# Altium PCB T&H Data Logger.PcbDoc
Units mm, origin at the board's own origin, x right, y up, seen from the top; angles counter-clockwise.
Board outline 79.25 x 89.7 mm, 2 copper layers (Top Layer, Bottom Layer), stack 1.569 mm thick; 39 components, 30 nets, 147 pads, 29 vias.
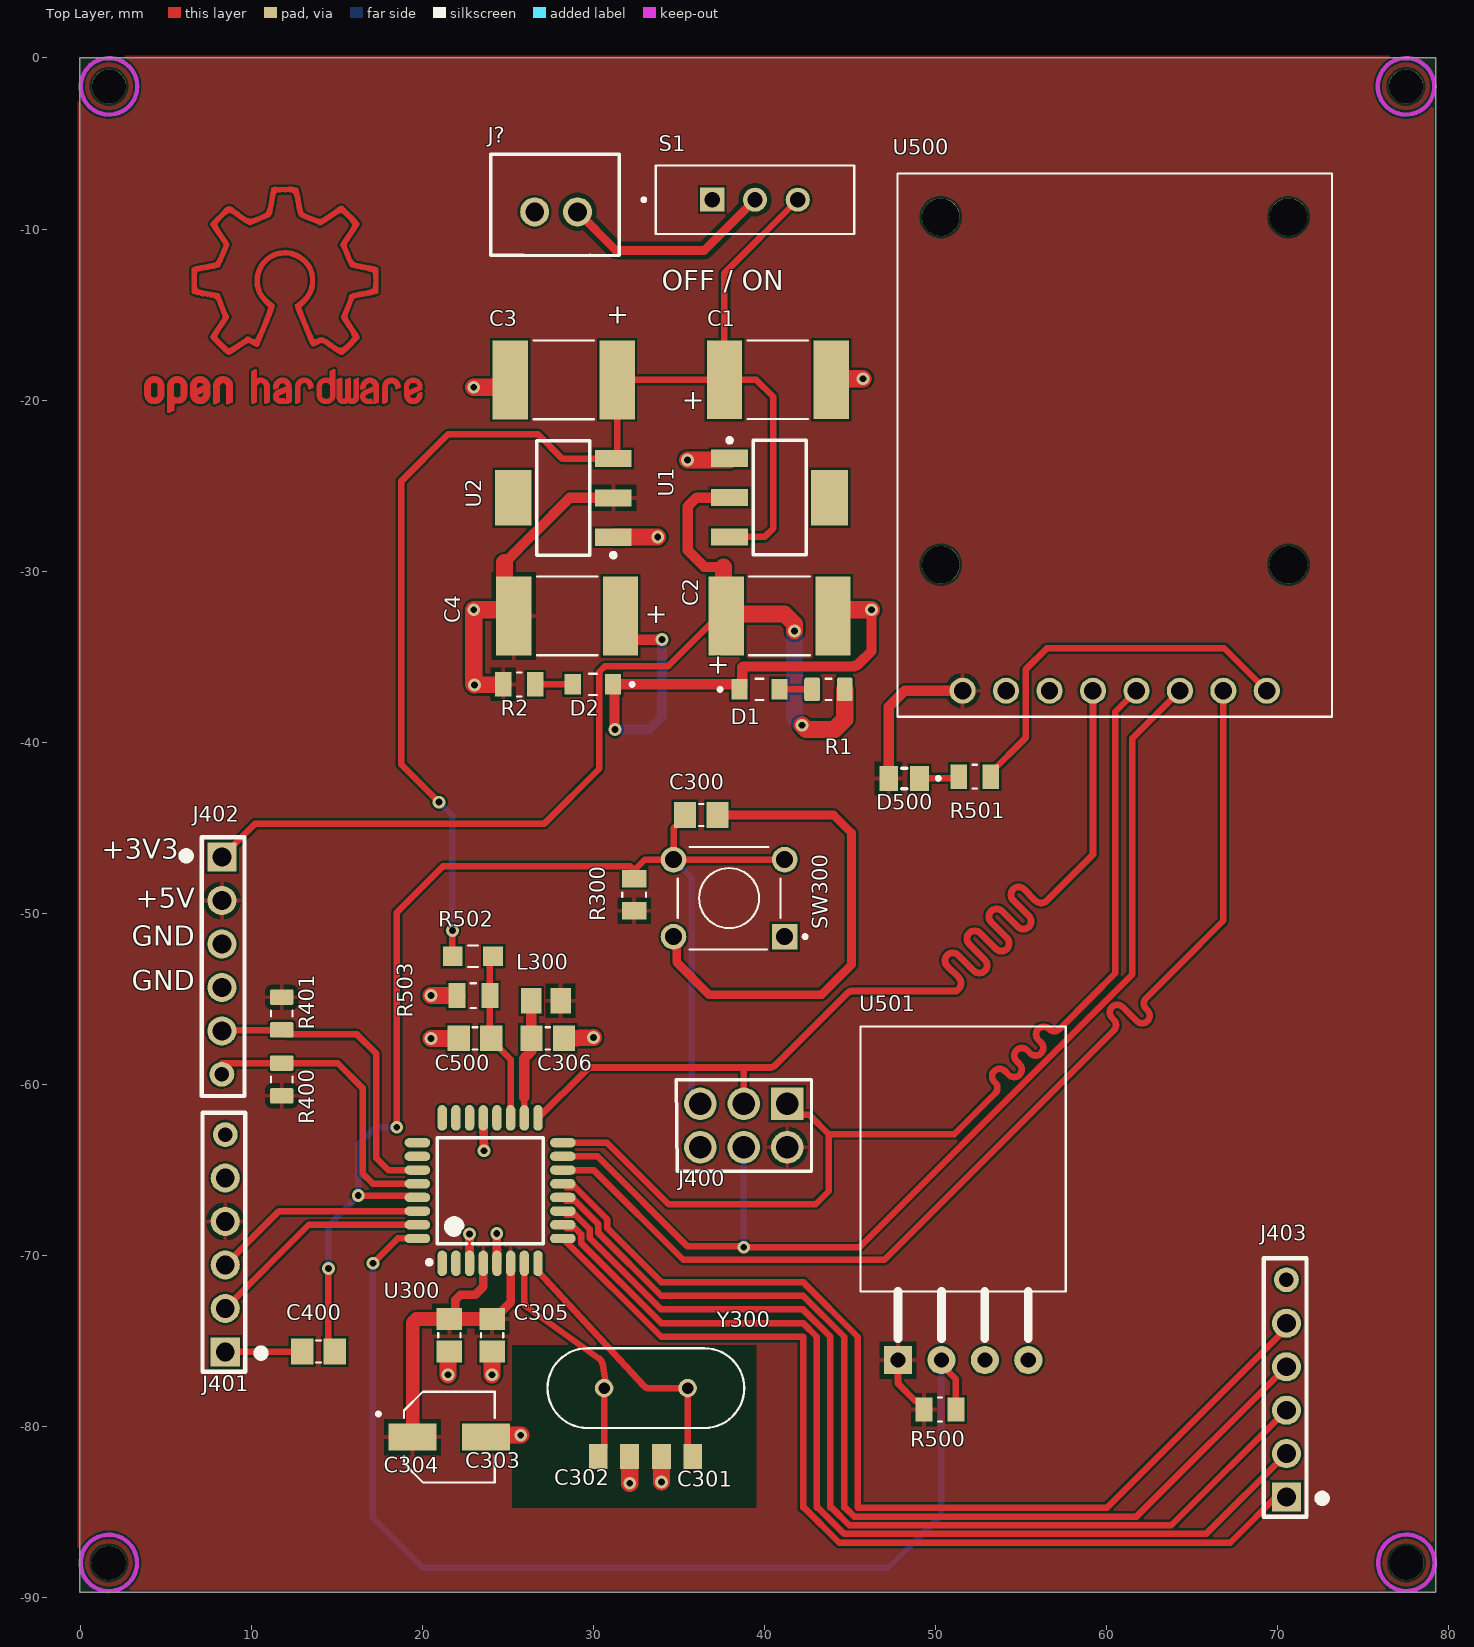
[diagram p0: Top Layer view]
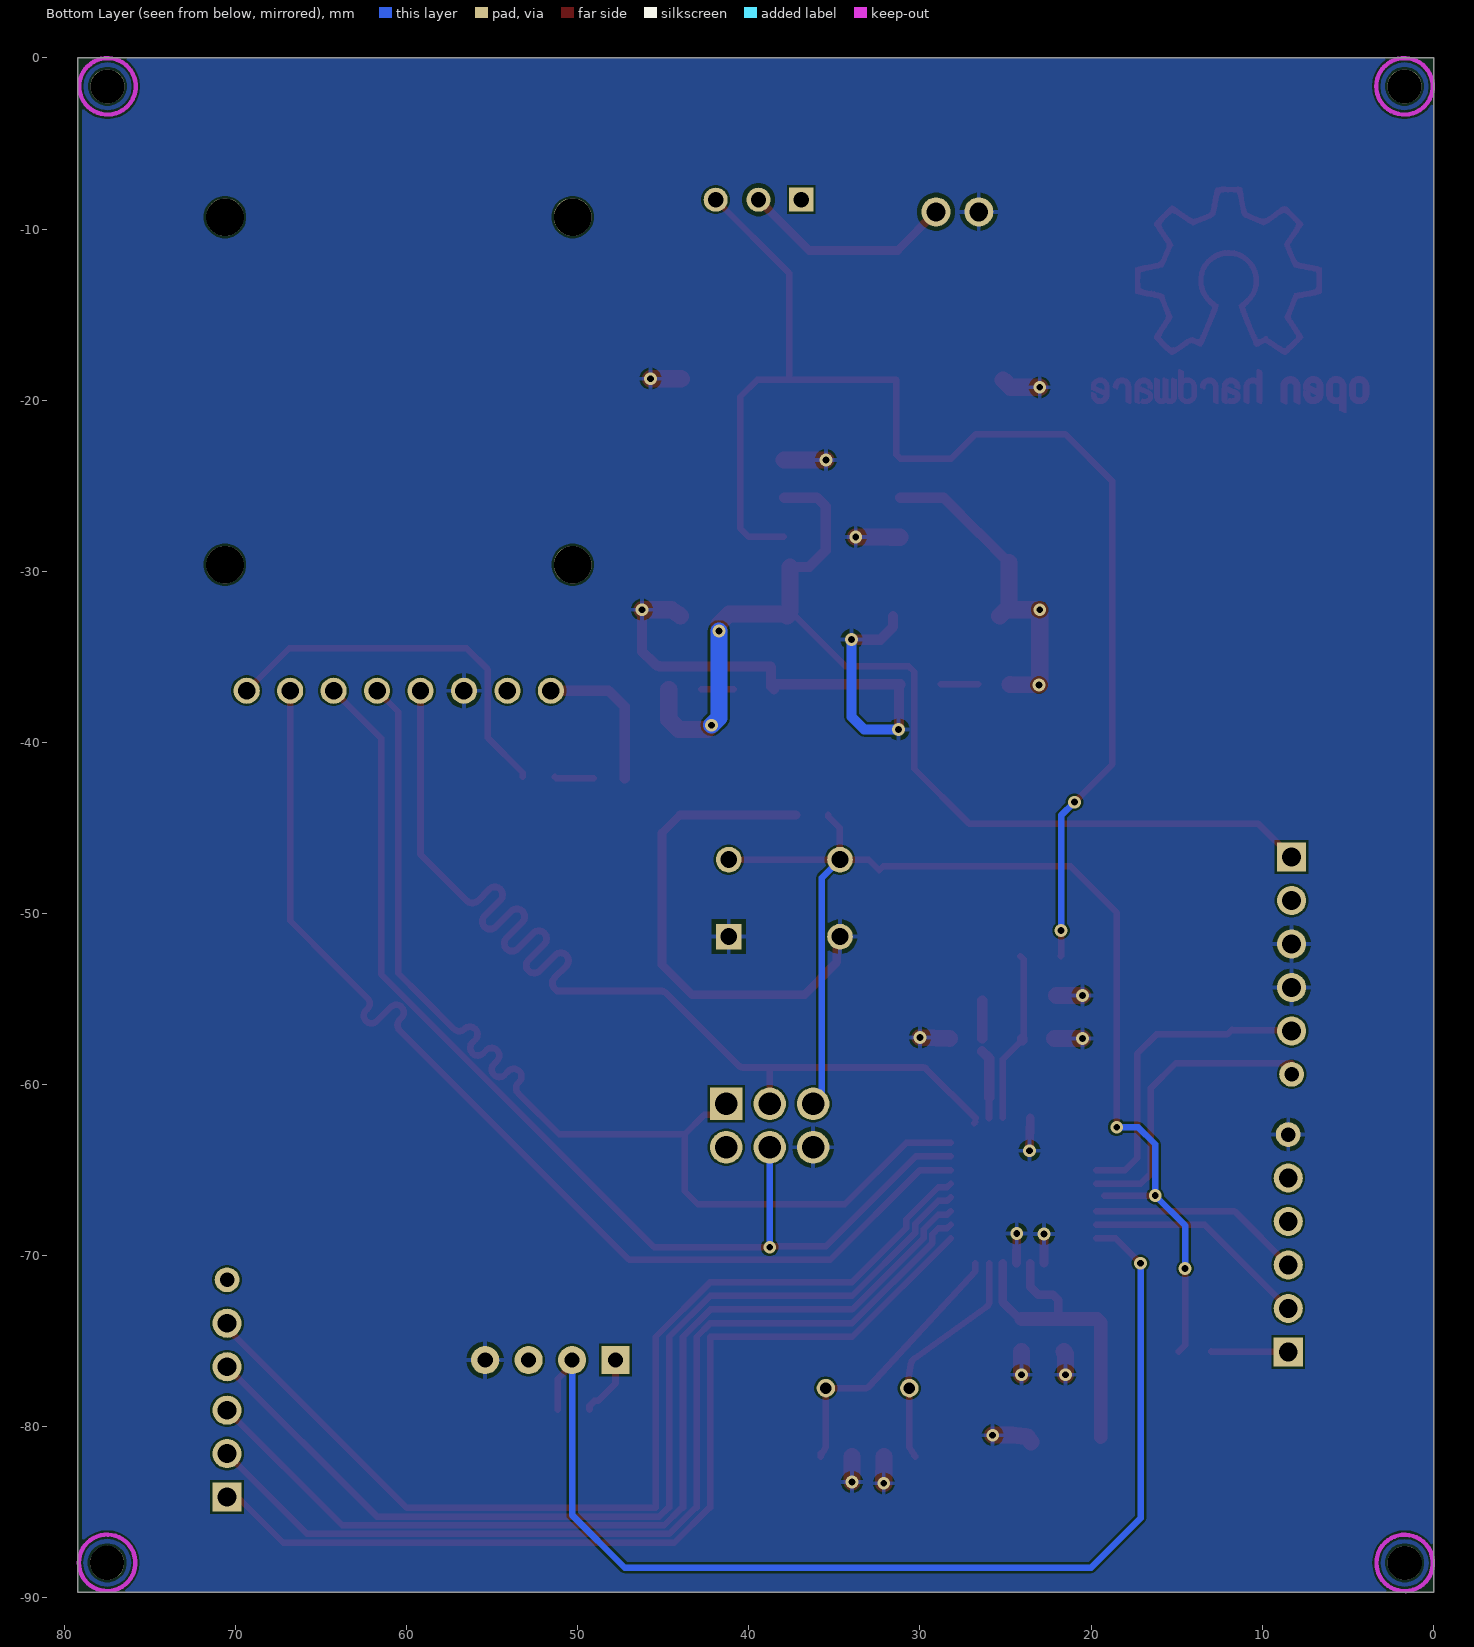
[diagram p1: Bottom Layer view, seen from below]
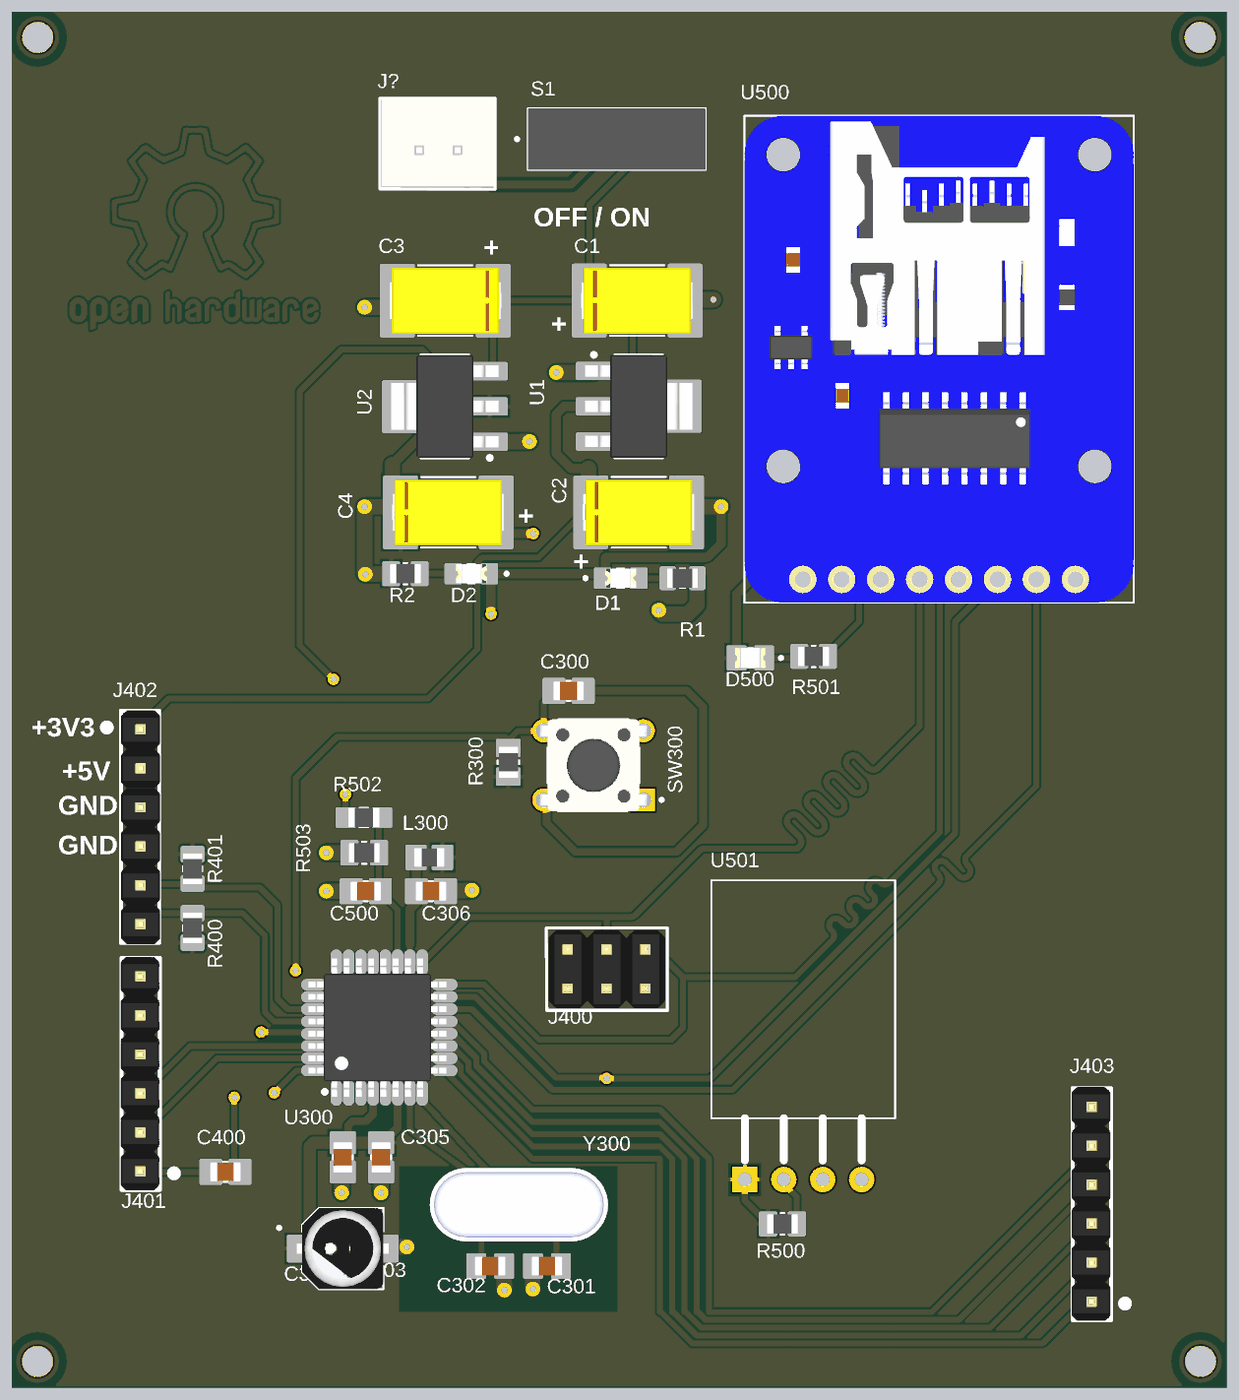
[diagram p2: 3D render of the assembled board from above, using the file's embedded part models]

## Layer stack, top to bottom
Top Solder: solder mask 0.0254, SM-001, Dk 4
Top Layer: signal copper 0.035
Dielectric 1: core 1.4986, Core-043, Dk 4.3
Bottom Layer: signal copper 0.035
Bottom Solder: solder mask 0.0254, SM-001, Dk 4

## Board outline
-0.019,-89.682 -0.019,0.016 79.228,0.016 79.228,-89.682

## Design rules (kind name [scope] priority, off if disabled: settings)
Clearance Clearance_POWER [InNetClass('POWER_nets')] p1: gap=0.254 ignorepadtopadclearanceinfootprint=FALSE
Clearance [All] p2: gap=0.127 ignorepadtopadclearanceinfootprint=FALSE
MatchedLengths [InNetClass('SPI')] p1: tolerance=3.81 checknetsindiffpair=FALSE checkdiffpairvsdiffpair=TRUE checkxsignals=TRUE checkothers=TRUE
MinimumSolderMaskSliver [All] p1: minsoldermaskwidth=0.102
PasteMaskExpansion [All] p1: expansion=0.102
PolygonConnect [All] p1: connectstyle=Relief reliefconductorwidth=0.254 reliefentries=4 polygonreliefangle="90 Angle" airgapwidth=0.254
RoutingVias [All] p1: holewidth=0.4 width=0.75 viastyle="Through Hole" minholewidth=0.3 minwidth=0.7 maxholewidth=0.7 maxwidth=1.2
SilkToSilkClearance [All] p1: silktosilkclearance=0.102
SilkToSolderMaskClearance [IsPad] p1: minsilkscreentomaskgap=0.102 clearancetoexposedcopper=TRUE
SolderMaskExpansion [All] p1: expansion=0.102 istentingtop=FALSE
Width Width_Power [InNetClass('POWER_nets')] p1: maxlimit=1.27 minlimit=0.508 preferedwidth=0.61
Width [All] p2: maxlimit=1 minlimit=0.381 preferedwidth=0.381
26 further rules are at their usual default settings.

## Classes and differential pairs
net class SPI: SPI_CS SPI_MISO SPI_MOSI SPI_SCK
net class POWER_nets: +V_BATT0
component class Sensor_DataS: C500 D500 R500 R501 R502 R503 U500 U501
component class "Power Supply": C1 C2 C3 C4 D1 D2 J? R1 R2 S1 U1 U2
component class MCU: C300 C301 C302 C303 C304 C305 C306 L300 R300 SW300 U300 Y300
component class Connectors: C400 GND J400 J401 J402 J403 R400

## Components (designator, comment, footprint, x,y, rotation, side; value= is the part's Value field where it differs from the comment)
C1 "T495D106K035AHE300" CAPPC7343X430N 40.775,-18.809 r0 top value=10uF
C2 "T495D106K035AHE300" CAPPC7343X430N 40.875,-32.609 r0 top value=10uF
C3 "T495D106K035AHE300" CAPPC7343X430N 28.257,-18.814 r180 top value=10uF
C4 "T495D106K035AHE300" CAPPC7343X430N 28.457,-32.614 r0 top value=10uF
C300 "GCM21BR71H104KA37K" CAPC2012X135N 36.3,-44.25 r180 top
C301 "GRM21A5C2E330JW01D" CAPC2012X100N 31.188,-81.746 r180 top value=33pF
C302 "GRM21A5C2E330JW01D" CAPC2012X100N 34.891,-81.746 r0 top value=33pF
C303 "EEEHB1H4R7AR" CAP_EEEHB1H4R7AR 21.575,-80.609 r0 top
C304 "GCM21BR71H104KA37K" CAPC2012X135N 21.575,-74.659 r270 top
C305 "GCM21BR71H104KA37K" CAPC2012X135N 24.075,-74.659 r270 top
C306 "GCM21BR71H104KA37K" CAPC2012X135N 27.325,-57.309 r0 top
C400 "GCM21BR71H104KA37K" CAPC2012X135N 13.925,-75.609 r180 top
C500 "GCM21BR71H104KA37K" CAPC2012X135N 23.075,-57.309 r180 top
D1 "V0805-SMD-R_(Red)" "LED_V0805-SMD-R (Red)" 39.7,-36.909 r0 top
D2 "V0805-SMD-R_(Red)" "LED_V0805-SMD-R (Red)" 29.957,-36.614 r180 top
D500 "SML-LXT0805GW-TR" LEDC2012X120N 48.155,-42.109 r180 top
J400 "ICSP" PINHEADER-3X2_2.54MM 38.783,-62.402 r270 top
J401 "Pin-Header-2.54-1X6" PIN-HEADER-2.54MM-1X6 8.475,-75.629 r180 top
J402 "Pin-Header-2.54-1X6" PIN-HEADER-2.54MM-1X6 8.275,-46.709 r0 top
J403 "Pin-Header-2.54-1X6" PIN-HEADER-2.54MM-1X6 70.5,-84.12 r180 top
J? "B2B-XH-A" B2B-XH-A 27.81,-8.996 r0 top
L300 "LQM21DN100N00D" INDC2012X105N 27.215,-55.109 r0 top
R1 "RC0805FR-1375RL" RESC2012X60N 43.73,-36.909 r0 top
R2 "TNPW0805150RBHEA" RESC2012X55N 25.657,-36.614 r0 top
R300 "CRGH0805J10K" RESC2012X65N 32.375,-48.909 r270 top
R400 "RC0805JR-134K7L" RESC2012X60N 11.775,-59.709 r270 top
R401 "RC0805JR-134K7L" RESC2012X60N 11.775,-55.854 r90 top
R500 "CRGH0805J10K" RESC2012X65N 50.25,-79 r180 top
R501 "TNPW0805150RBHEA" RESC2012X55N 52.285,-42.009 r0 top
R502 "ERJS06D2003V" RES_ERJS06D2003V 22.95,-52.509 r180 top
R503 "ERJP6WF1003V" RESC2012X75N 22.975,-54.809 r0 top
S1 "MINI-SPDT-SW" SW_MINI-SPDT-SW 39.439,-8.286 r0 top
SW300 "1825910-6" SW_1825910-6-4 37.925,-49.109 r180 top
U1 "LM1117MPX-3.3V" SOT230P700X180-4N 40.875,-25.7 r0 top
U2 "LM1117MPX-5.0V" SOT230P700X180-4N 28.232,-25.714 r180 top
U300 "ATmega328P" TQFP80P900X900X120-32N 23.955,-66.203 r90 top
U500 "254" MODULE_254 60.463,-22.636 r270 top
U501 "TEM-HUM-DHT11(4P-15.5X12.0MM)" SNR4-2.54-15.5X12.0X5.5MM 51.605,-64.359 r90 top
Y300 "HC-49/U-S16000000ABJB" XTAL_HC49P488W43L1150T466H350 33.06,-77.75 r0 top value="16 MHz"

## Footprints (in the part's own frame and the unit in brackets; to place one, negate y for a bottom-side part, rotate by r counter-clockwise, add the part's x,y. Pads: shape width x height; smd on the part's side, far side on the other; paste and mask are expansions set on the pad)
B2B-XH-A [mm]
  round 1.7 hole 1.1: 1(-1.25,0) 2(1.25,0)
  silkscreen extent -3.81,-2.55 3.7,3.36, body extent -3.7,-2.39 3.7,3.36, height 3.4
CAP_EEEHB1H4R7AR [mm]
  rect 2.8x1.6 smd: 1(-2.15,0) 2(2.15,0)
  silkscreen extent -4.25,-2.65 2.65,2.65, body extent -3,-2.65 3,2.65, height 5.8
CAPC2012X100N [mm]
  rect 1.1x1.47 smd: 1(-0.909,0) 2(0.909,0)
  body extent -1,-0.63 1,0.63, height 1
CAPC2012X135N [mm]
  rect 1.3x1.5 smd: 1(-0.95,0) 2(0.95,0)
  silkscreen extent -0.13,-0.65 0.13,0.65, body extent -1,-0.63 1,0.63, height 0.72
CAPPC7343X430N [mm]
  rect 2.07x4.61 smd: 1(-3.121,0) 2(3.121,0)
  silkscreen extent -1.77,-2.3 1.77,2.3, body extent -3.65,-2.15 3.65,2.15, height 3.1
INDC2012X105N [mm]
  rect 1.2x1.47 smd: 1(-0.86,0) 2(0.86,0)
  body extent -1,-0.63 1,0.63, height 1.05
"LED_V0805-SMD-R (Red)" [mm]
  rect 0.95x1.2 smd: 1(-1.175,0) 2(1.175,0)
  silkscreen extent -2.4,-0.63 0.23,0.63, body extent -1,-0.63 1,0.63, height 0.8
LEDC2012X120N [mm]
  rect 1.1x1.45 smd: A(0.9,0) C(-0.9,0)
  silkscreen extent -2.1,-0.6 0.15,0.6, body extent -1,-0.65 1,0.65, height 0.9
MODULE_254 [mm]
  round 1.53 hole 1.02: 1(14.351,8.89) 2(14.351,6.35) 3(14.351,3.81) 4(14.351,1.27) 5(14.351,-1.27) 6(14.351,-3.81) 7(14.351,-6.35) 8(14.351,-8.89)
  round 2.2 hole 2.2 unplated: ""(-13.335,10.16) ""(-13.335,-10.16) ""(6.985,10.16) ""(6.985,-10.16)
  silkscreen extent -15.88,-12.7 15.88,12.7, body extent -15.88,-12.7 15.88,12.7, height 3.81
PIN-HEADER-2.54MM-1X6 [mm]
  rect 1.7x1.7 hole 1.1: 1(0,0)
  round 1.7 hole 1.1: 2(0,-2.54) 3(0,-5.08) 4(0,-7.62) 5(0,-10.16)
  round 1.45 hole 0.85: 6(0,-12.7)
  silkscreen extent -2.29,-13.97 1.33,1.16, body extent -1.15,-14.04 1.39,1.2, height 9.2
PINHEADER-3X2_2.54MM [mm]
  rect 1.9x1.9 hole 1.3: 1(-1.27,2.54)
  round 1.9 hole 1.3: 2(1.27,2.54) 3(-1.27,0) 4(1.27,0) 5(-1.27,-2.54) 6(1.27,-2.54)
  silkscreen extent -2.69,-3.94 2.68,3.96, body extent -2.54,-3.79 2.54,3.83, height 9.2
RES_ERJS06D2003V [mm]
  rect 1.15x1.15 smd: 1(-1.175,0) 2(1.175,0)
  silkscreen extent -0.28,-0.63 0.28,0.63, body extent -1,-0.63 1,0.63, height 0.6
RESC2012X55N [mm]
  rect 0.97x1.42 smd: 1(-0.93,0) 2(0.93,0)
  silkscreen extent -0.12,-0.7 0.12,0.7, body extent -1,-0.63 1,0.63, height 0.55
RESC2012X60N [mm]
  rrect25% 0.92x1.38 smd: 1(-0.955,0) 2(0.955,0)
  silkscreen extent -0.18,-0.63 0.18,0.63, body extent -1,-0.63 1,0.63, height 0.3
RESC2012X65N [mm]
  rect 1x1.42 smd: 1(-0.935,0) 2(0.935,0)
  silkscreen extent -0.12,-0.7 0.12,0.7, body extent -1,-0.63 1,0.63, height 0.65
RESC2012X75N [mm]
  rect 0.99x1.47 smd: 1(-0.965,0) 2(0.965,0)
  silkscreen extent -0.15,-0.72 0.15,0.72, body extent -1,-0.63 1,0.63, height 0.75
SNR4-2.54-15.5X12.0X5.5MM [mil]
  rect 65x65 hole 35: 1(-462.6,150)
  round 65 hole 35: 2(-462.6,50) 3(-462.6,-50) 4(-462.6,-150)
  silkscreen extent -413,-236 305,236
SOT230P700X180-4N [mm] "SOT223, 4-Leads, Body 6,50x7,00mm (avg), Pitch 2,30mm, IPC Medium Density"
  rect 2.15x1 smd: 1(-2.925,2.3) 2(-2.925,0) 3(-2.925,-2.3)
  rect 2.15x3.25 smd: 4(2.925,0)
  silkscreen extent -3.05,-3.35 1.55,3.47, body extent -3.5,-3.35 3.5,3.35, height 1.8
SW_1825910-6-4 [mm]
  rect 1.498x1.498 hole 0.99: 1(-3.25,2.25)
  round 1.498 hole 0.99: 2(3.25,2.25) 3(-3.25,-2.25) 4(3.25,-2.25)
  silkscreen extent -4.54,-3 3,3, body extent -3.9,-3 3.9,3, height 5.01
SW_MINI-SPDT-SW [mm]
  rect 1.408x1.408 hole 0.9: 1(-2.5,0)
  round 1.408 hole 0.9: 2(0,0) 3(2.5,0)
  silkscreen extent -6.6,-2 5.8,2, body extent -5.8,-2 5.8,2, height 7.4
TQFP80P900X900X120-32N [mm] "TQFP, 32-Leads, Body 7,00x7,00mm, Pitch 0,80mm, IPC Medium Density"
  oval 1.5x0.55 smd: 1(-4.25,2.8) 2(-4.25,2) 3(-4.25,1.2) 4(-4.25,0.4) 5(-4.25,-0.4) 6(-4.25,-1.2) 7(-4.25,-2) 8(-4.25,-2.8) 17(4.25,-2.8) 18(4.25,-2) 19(4.25,-1.2) 20(4.25,-0.4) 21(4.25,0.4) 22(4.25,1.2) 23(4.25,2) 24(4.25,2.8)
  oval 0.55x1.5 smd: 9(-2.8,-4.25) 10(-2,-4.25) 11(-1.2,-4.25) 12(-0.4,-4.25) 13(0.4,-4.25) 14(1.2,-4.25) 15(2,-4.25) 16(2.8,-4.25) 25(2.8,4.25) 26(2,4.25) 27(1.2,4.25) 28(0.4,4.25) 29(-0.4,4.25) 30(-1.2,4.25) 31(-2,4.25) 32(-2.8,4.25)
  silkscreen extent -4.32,-3.1 3.1,3.68, body extent -4.5,-4.37 4.5,4.63, height 1.2
XTAL_HC49P488W43L1150T466H350 [mm]
  round 1.08 hole 0.68: 1(-2.44,0) 2(2.44,0)
  silkscreen extent -5.75,-2.33 5.75,2.33, body extent -5.75,-2.33 5.75,2.33, height 3.5

## Part data
C1 C2 C3 C4: "Capacitor,10uF,35VDC,10-% Tol,10+% Tol", Package=None, Availability=Unavailable, MF="{'manufacturer': u'KEMET'}", MP=T495D106K035AHE300, Price=None
C300 C304 C305 C306 C400 C500: ".1UF 50V 10% 080", Package=None, Availability=Unavailable, MF="{'manufacturer': u'Murata'}", MP=GCM21BR71H104KA37K, Price=None
C301 C302: "Cap Ceramic 33pF 250V C0G 5% Pad SMD 0805 125C T/R", Package=None, Availability=Unavailable, MF="{'manufacturer': u'Murata'}", MP=GRM21A5C2E330JW01D, Price=None
C303 R1 R2 R400 R401 R501 R502 U500: Package=None, Availability=Unavailable, Price=None
  C303: MF="{'manufacturer': u'Panasonic'}", MP=EEEHB1H4R7AR
  R1: MF="{'manufacturer': u'Yageo'}", MP=RC0805FR-1375RL
  R2 R501: MF="{'manufacturer': u'Vishay'}", MP=TNPW0805150RBHEA
  R400 R401: MF="{'manufacturer': u'Yageo'}", MP=RC0805JR-134K7L
  R502: MF="{'manufacturer': u'Panasonic'}", MP=ERJS06D2003V
  U500: MF="{'manufacturer': u'Adafruit'}", MP=254
D1 D2: "V0805 - Valcon 0805 Type Surface Mount LED", Package=None, Availability=Unavailable, MF="{'manufacturer': u'Valcon'}", MP=V0805-SMD-R_(Red), Price=None
D500: "Surface Mount LED Lamps 0805 Thin PCB Green <a href=\"https://pricing.snapeda.com/parts/SML-LXT0805GW-TR/Lumex%20Opto/Components%20Inc./view-part?ref=eda\">Check availability</a>", Package=None, Availability=Unavailable, MF="{'manufacturer': u'Lumex Opto/Components'}", MP=SML-LXT0805GW-TR, Price=None
J?: library part B2B-XH-A-2Pin
L300: "Power inductor SMD 0805 10uH", Package=None, Availability=Unavailable, MF="{'manufacturer': u'Murata'}", MP=LQM21DN100N00D, Price=None
R300 R500: "Res Thick Film 0805 10K Ohm 5% 1/3W Â±100ppm/Â°C Molded SMD SMD T/R", Package=None, Availability=Unavailable, MF="{'manufacturer': u'TE Connectivity'}", MP=CRGH0805J10K, Price=None
R503: "100K OHM 1% 1/2W", Package=None, Availability=Unavailable, MF="{'manufacturer': u'Panasonic'}", MP=ERJP6WF1003V, Price=None
S1: "Simple breadboard friendly SPDT slide switch. Rated at 30V/200mA with operating force of 250 +/-100gf.", Package=None, Availability=Unavailable, MF="{'manufacturer': u'Gravitech'}", MP=MINI-SPDT-SW, Price=None
SW300: "Switch Tactile OFF (ON) SPST Round Button PC Pins 0.05A 24VDC 100000Cycles 1.57N Thru-Hole Loose", Package=None, Availability=Unavailable, MF="{'manufacturer': u'TE Connectivity'}", MP=1825910-6, Price=None
U1: "LM1117MPX-33NOPB", Vout=5V
U2: "LM1117MPX-50NOPB", Vout=5V
U300: "8-bit AVR Microcontroller with 32K Bytes In-System / Programmable Flash"
U501: "314010000", Package=None, Availability=Unavailable, MF="{'manufacturer': u'UNIVERSAL-SOLDER Electronics Ltd'}", MP=DHT11, Price=None
Y300: "HC49US Series 16 MHz Â±30 ppm 18 pF -20 to +70 Â°C Through Hole AT-CUT Crystal", Package=None, Availability=Unavailable, MF="{'manufacturer': u'Citizen Finedevice Co Ltd'}", MP=HC-49/U-S16000000ABJB, Price=None

## Free pads (board coordinates)
  round 2 hole 2: 11(1.668,-87.967) 11(1.679,-1.661) 11(77.487,-1.661) 11(77.51,-87.959)

## Via types
v1: diameter 0.75, hole 0.4, Top Layer to Bottom Layer, 28 vias
v2: diameter 0.75, hole 0.4, Top Layer to Bottom Layer, tented top, 1 vias

## Nets (pads, with @x,y where several pads share a name; then routed paths per layer and width w, separated by ;. In a path a pad name is that pad's centre, name@x,y a point inside that pad or via, vN(x,y) a via of type N, cw(c..) or ccw(c..) an arc to the next point about the centre after c; other vN are vias at no path point)
+3V3: C2.1 J402.1 R1.2 U1.2 | length 66
  Top Layer w0.381: J402.1 10.234,-44.75 27.132,-44.75 30.34,-41.543 30.34,-35.883 30.663,-35.56 34.354,-35.56 37.6,-32.314 37.754,-32.16 37.754,-30.304
  Top Layer w0.6: 37.6,-29.75 36.465,-29.75 35.5,-28.785 35.5,-26.214 36.014,-25.7 U1.2
  Top Layer w1: C2.1@37.6,-32.35 37.6,-32.314 37.6,-29.75 ; C2.1 37.863,-32.5 41.164,-32.5 41.75,-33.086 v1(41.75,-33.5) ; v1(42.183,-39) 42.428,-39.245 44.099,-39.245 44.685,-38.659 R1.2
  Bottom Layer w1: v1(41.75,-33.5) 41.75,-38.567 v1(42.183,-39)
+5V: C4.1 C303.1 C304.1 C305.1 D500.A J400.2 J401.4 J402.2 L300.2 R2.1 R300.2 R400.2 R401.2 R500.2 U2.2 U300.4 U300.6 U500.8 U501.1 | length 51.2
  Top Layer w0.381: C305.1 C305.1@24.175,-73.709
  Top Layer w0.4: U501.1 47.795,-77.48 48.805,-78.49 49.015,-78.49 49.315,-78.79 R500.2
  Top Layer w0.508: C304.1@21.924,-73.36 21.924,-72.596 22.222,-72.299 23.085,-72.299 23.555,-71.829 U300.4 ; C305.1@24.175,-73.709 25.155,-72.729 U300.6
  Top Layer w0.6: 24.801,-29.5 26.535,-27.766 26.559,-27.766 28.611,-25.714 U2.2 ; D500.A 47.255,-37.93 48.198,-36.987 U500.8 U500.8@51.395,-36.809
  Top Layer w0.8: C303.1 19.425,-73.932 19.648,-73.709 C304.1 C305.1
  Top Layer w1: R2.1 v1(23.045,-36.651) 23,-36.605 v1(23,-32.25) C4.1@24.801,-32.25 ; 24.801,-29.5 24.801,-32.079 C4.1
+V_BATT: C1.1 C3.1 R502.2 S1.3 U1.3 U2.3 | length 80.1
  Top Layer w0.381: v1(20.971,-43.5) 18.75,-41.279 18.75,-24.75 21.5,-22 26.75,-22 28.164,-23.414 U2.3 31.378,-23.193 C3.1 31.384,-18.809 C1.1 ; v1(21.75,-51) 21.75,-52.484 R502.2 ; U1.3 40,-28 40.5,-27.5 40.5,-19.809 39.5,-18.809 C1.1 ; S1.3 37.654,-12.571 C1.1
  Bottom Layer w0.381: v1(20.971,-43.5) 21.75,-44.279 v1(21.75,-51)
+V_BATT0: J?.2 S1.2 | length 12.5
  Top Layer w0.508: J?.2 31.314,-11.25 36.475,-11.25 S1.2
AVCC: C306.1 L300.1 U300.18 | length 6.3
  Top Layer w0.4: U300.18 25.955,-60.75
  Top Layer w0.6: 25.955,-60.75 25.955,-58.479 26.375,-58.059 ; L300.1 26.365,-55.119 26.365,-57.299 C306.1
BATT_VOL: C500.1 R502.1 R503.2 U300.19 | length 10
  Top Layer w0.381: C500.1@24.025,-57.409 25.155,-58.539 U300.19 ; C500.1 23.94,-57.224 R503.2 23.94,-52.694 R502.1
  Top Layer w0.6: C500.1@24.025,-57.409 C500.1
D5: J403.1 U300.9 | length 56.4
  Top Layer w0.381: U300.9 33.952,-74.75 42.25,-74.75 42.25,-84.75 42.332,-84.75 44.364,-86.782 67.218,-86.782 J403.1@70.19,-83.81
D6: J403.2 U300.10 | length 57.9
  Top Layer w0.381: U300.10 28.412,-68.41 28.925,-68.41 29.272,-68.757 29.272,-69.27 33.952,-73.95 42.25,-73.95 43.05,-74.75 43.05,-84.75 43.132,-84.75 44.656,-86.274 65.806,-86.274 J403.2
D7: J403.3 U300.11 | length 58.8
  Top Layer w0.381: U300.11 28.412,-67.61 28.925,-67.61 29.78,-68.465 29.78,-68.978 33.952,-73.15 42.25,-73.15 43.85,-74.75 43.85,-84.75 43.932,-84.75 44.948,-85.766 63.774,-85.766 J403.3
D8: J403.4 U300.12 | length 59.8
  Top Layer w0.381: U300.12 28.412,-66.81 28.925,-66.81 30.288,-68.173 30.288,-68.686 33.952,-72.35 42.25,-72.35 44.65,-74.75 44.65,-84.75 44.732,-84.75 45.24,-85.258 61.742,-85.258 J403.4
D9: J403.5 U300.13 | length 60.7
  Top Layer w0.381: U300.13 28.412,-66.01 28.925,-66.01 30.796,-67.881 30.796,-68.394 33.952,-71.55 42.25,-71.55 45.45,-74.75 45.45,-84.75 60,-84.75 J403.5@70.5,-74.25
DATA_DHT11: R500.1 U300.32 U501.2 | length 66.1
  Top Layer w0.381: v1(17.106,-70.453) 18.556,-69.003 U300.32 ; U501.2 50.335,-76.384 51.185,-77.234 R500.1
  Bottom Layer w0.381: v1(17.106,-70.453) 17.106,-85.356 20,-88.25 47.25,-88.25 50.335,-85.165 U501.2
DTR: C400.2 J401.1 | length 4.5
  Top Layer w0.381: J401.1 12.955,-75.629 C400.2
FTDI_RX: J401.2 U300.31 | length 13.3
  Top Layer w0.381: J401.2 13.361,-68.203 U300.31
FTDI_TX: J401.3 U300.30 | length 12.5
  Top Layer w0.381: J401.3 11.621,-67.403 U300.30
GND: C1.2 C2.2 C3.2 C4.2 C300.1 C301.1 C302.1 C303.2 C304.2 C305.2 C306.2 C500.2 D1.1 D2.1 J400.6 J401.6 J402.3 J402.4 J?.1 R503.1 SW300.1 SW300.2 U1.1 U2.1 U300.3 U300.5 U300.21 U500.6 U501.4 | length 92.2
  Top Layer w0.381: C1.2 C1.2@43.955,-18.75
  Top Layer w0.508: v1(22.75,-68.75) 22.75,-70.244 ccw(c23.258,-70.244) U300.3@22.75,-70.256 ; U300.3 U300.3@22.75,-70.256 ; U300.21 v1(23.6,-63.873) ; v1(24.346,-68.712) U300.5 ; SW300.2 34.864,-51.548 34.864,-52.864 36.75,-54.75 43.329,-54.75 45.079,-53 45.079,-45.298 44.032,-44.25 C300.1 ; U300.3@22.75,-70.256 22.755,-70.256 U300.3@22.75,-70.256
  Top Layer w0.6: v1(31.25,-39.25) 31.221,-39.221 31.221,-36.703 D2.1 38.35,-36.614 38.525,-36.789 D1.1 38.7,-36.734 38.7,-35.62 38.755,-35.565 45.111,-35.565 ccw(c45.111,-34.965) 45.536,-35.389 46.25,-34.675 v1(46.25,-32.25) ; C4.2 31.578,-33.265 32.313,-34 v1(34,-34)
  Top Layer w1: v1(20.5,-57.309) C500.2 ; v1(20.5,-54.809) R503.1 ; v1(21.5,-76.968) 21.5,-75.759 C304.2 ; v1(23,-19.25) 24.701,-19.25 C3.2 ; C303.2@23.5,-80.909 C303.2 23.823,-80.57 24.625,-80.5 v1(25.75,-80.5) ; v1(24.07,-76.968) C305.2 ; C306.2 v1(30,-57.25) ; U2.1 31.732,-28.014 v1(33.75,-28) ; C301.1 v1(32.114,-83.314) ; v1(33.969,-83.243) 33.969,-81.993 33.982,-81.98 C302.1 ; v1(35.5,-23.5) 37.49,-23.5 cw(c37.49,-24.5) 37.508,-23.5 37.51,-23.5 37.948,-23.509 U1.1@37.95,-23.509 ; C2.2 44.531,-32.25 v1(46.25,-32.25)
  Top Layer w1.016: C1.2@43.955,-18.75 v2(45.75,-18.75)
  Bottom Layer w0.6: v1(31.25,-39.25) 33.25,-39.25 34,-38.5 v1(34,-34)
I2C_SCK: J402.6 R400.1 | length 17.9
  Top Layer w0.381: J402.6 8.275,-58.754 R400.1 15.05,-58.754 16.5,-60.204 16.5,-65.197 17.106,-65.803 19.705,-65.803
I2C_SDA: J402.5 R401.1 | length 18.4
  Top Layer w0.381: J402.5 8.305,-56.839 11.745,-56.839 R401.1 12.044,-57.078 16.175,-57.078 17.307,-58.211 17.307,-64.31 18,-65.003 19.705,-65.003
NetC300_1: 
NetD1_2: D1.2 R1.1 | length 1.9
  Top Layer w0.381: D1.2 R1.1
NetD2_2: D2.2 R2.2 | length 2.2
  Top Layer w0.381: R2.2 D2.2
NetD500_C: D500.C R501.1 | length 2.3
  Top Layer w0.381: D500.C 51.255,-42.109 R501.1
NetR501_2: R501.2 U500.1 | length 22.8
  Top Layer w0.381: R501.2 53.215,-41.784 55.25,-39.748 55.25,-35.75 56.5,-34.5 66.866,-34.5 U500.1
OSCI: C301.2 U300.7 Y300.1 | length 13.7
  Top Layer w0.381: U300.7 25.955,-72.701 ccw(c26.336,-72.699) 26.113,-73.008 30.355,-76.045 cw(c30.134,-76.354) 30.489,-76.216 30.514,-76.282 cw(c30.159,-76.42) 30.535,-76.36 Y300.1@30.759,-77.707 ; C301.2@30.336,-81.689 C301.2 30.62,-81.201 Y300.1
OSCO: C302.2 U300.8 Y300.2 | length 16.4
  Top Layer w0.381: U300.8 26.755,-70.928 32.947,-77.628 ; 32.947,-77.628 ccw(c33.227,-77.369) 33.227,-77.75 Y300.2 35.5,-81.201 C302.2 C302.2@35.8,-81.561
RST: C300.2 C400.1 J400.5 R300.1 SW300.3 SW300.4 U300.29 | length 73.6
  Top Layer w0.381: v1(14.5,-70.75) 14.5,-75.234 C400.1 ; v1(16.25,-66.5) U300.29@19.23,-66.5 ; v1(18.5,-62.5) 18.5,-49.95 21.2,-47.25 32.151,-47.25 32.375,-47.474 32.99,-46.859 SW300.4 ; C300.2 35.35,-44.35 34.675,-45.025 SW300.4 ; J400.5@35.859,-61.515 ccw(c35.859,-61.132) J400.5 ; SW300.3 SW300.4
  Bottom Layer w0.381: v1(14.5,-70.75) 14.5,-68.25 v1(16.25,-66.5) 16.25,-63.5 17.25,-62.5 v1(18.5,-62.5) ; SW300.4 35.741,-47.925 35.741,-60.946 J400.5@35.571,-61.117
SPI_CS: U300.14 U500.2 | length 65.4
  Top Layer w0.381: U300.14 30.003,-65.003 35.25,-70.25 47,-70.25 56.625,-60.625 58.875,-58.375 60.274,-56.976 60.409,-56.841 ccw(c60.094,-56.527) 60.409,-56.213 60.3,-56.104 cw(c60.615,-55.79) 60.3,-55.475 cw(c60.615,-55.79) 60.929,-55.475 61.75,-56.297 ; 61.75,-56.297 ccw(c62.065,-55.983) 62.379,-56.297 ccw(c62.065,-55.983) 62.379,-55.668 62.295,-55.584 cw(c62.609,-55.27) 62.295,-54.955 64.128,-53.122 66.813,-50.437 U500.2
SPI_MISO: J400.1 U300.16 U500.4 | length 65.7
  Top Layer w0.381: U300.16 30.792,-63.403 34.389,-67 42.985,-67 43.75,-66.235 43.75,-62.91 ; J400.1 41.971,-61.78 42.62,-61.78 43.75,-62.91 ; U500.4 60.5,-38.22 60.5,-53.5 59.107,-54.893 57.248,-56.752 cw(c56.934,-56.438) 56.619,-56.752 ccw(c56.305,-57.066) 55.991,-56.752 ccw(c56.305,-57.066) 55.991,-57.381 56.16,-57.55 cw(c55.846,-57.864) 56.16,-58.179 cw(c55.846,-57.864) 55.531,-58.179 55.349,-57.996 ccw(c55.035,-58.311) 54.72,-57.996 ccw(c55.035,-58.311) 54.72,-58.625 54.903,-58.807 cw(c54.588,-59.122) 54.903,-59.436 cw(c54.588,-59.122) 54.274,-59.436 54.05,-59.212 ccw(c53.736,-59.526) 53.422,-59.212 ccw(c53.736,-59.526) 53.422,-59.841 53.476,-59.895 cw(c53.162,-60.21) 53.476,-60.524 53.341,-60.659 51.09,-62.91 43.75,-62.91
SPI_MOSI: J400.4 U300.15 U500.3 | length 66.1
  Top Layer w0.381: U300.15 30.232,-64.203 35.5,-69.471 38.739,-69.471 v1(38.783,-69.515) 45.542,-69.515 61.5,-53.557 61.5,-39.76 U500.3 ; J400.4@38.783,-64.083 J400.4
  Bottom Layer w0.381: v1(38.783,-69.515) J400.4
SPI_SCK: J400.3 U300.17 U500.5 | length 64.8
  Top Layer w0.381: U300.17@26.755,-62.191 U300.17@26.833,-62.269 ; U300.17@26.755,-61.968 U300.17 ; U500.5@58.939,-36.733 U500.5
  Top Layer w0.4: U300.17@26.755,-61.968 29.606,-59.117 cw(c29.888,-59.4) 29.888,-59 38.783,-59 ; J400.3 38.783,-59 ; 50.673,-52.437 ccw(c50.994,-52.758) 50.673,-53.079 51.351,-53.757 cw(c51.03,-54.078) 51.351,-54.399 51.209,-54.541 45.125,-54.541 ccw(c45.125,-54.941) 44.843,-54.657 40.617,-58.883 cw(c40.334,-58.6) 40.334,-59 38.783,-59 ; 50.673,-52.437 cw(c50.994,-52.758) 51.315,-52.437 52.235,-53.357 ccw(c52.556,-53.036) 52.877,-53.357 ccw(c52.556,-53.036) 52.877,-52.715 51.957,-51.795 cw(c52.278,-51.474) 51.957,-51.153 cw(c52.278,-51.474) 52.599,-51.153 53.519,-52.073 ccw(c53.84,-51.752) 54.161,-52.073 ccw(c53.84,-51.752) 54.161,-51.431 53.241,-50.511 cw(c53.562,-50.19) 53.241,-49.869 cw(c53.562,-50.19) 53.883,-49.869 54.803,-50.789 ccw(c55.124,-50.468) 55.445,-50.789 ccw(c55.124,-50.468) 55.445,-50.147 54.529,-49.231 cw(c54.85,-48.909) 54.529,-48.588 cw(c54.85,-48.909) 55.171,-48.588 55.845,-49.263 ccw(c56.166,-48.942) 56.487,-49.263 57.441,-48.309 59.193,-46.557 U500.5
pads on no net: J401.5 J403.6 S1.1 U1.4 U2.4 U300.1 U300.2 U300.20 U300.22 U300.23 U300.24 U300.25 U300.26 U300.27 U300.28 U500. U500.7 U501.3

## Polygon pours and split planes (outlines as drawn)
GND on Bottom Layer "GND_L02_P000" (solid, pour order 0): -0.019,0.016 78.977,0.016 78.977,-89.627 79.032,-89.682 -0.019,-89.682
+5V on Top Layer "+5V_L01_P008" (solid, pour order 8): -0.148,-0.234 0.215,0.129 79.098,0.129 79.098,-89.568 0.204,-89.568 -0.148,-89.216

## Keep-outs
Keep-Out Layer:
  circle w0.254: c77.51,-87.959 r1.65
  circle w0.254: c1.668,-87.967 r1.65
  circle w0.254: c1.679,-1.661 r1.65
  circle w0.254: c77.487,-1.661 r1.65

## Other copper
Top Layer:
  drawing of 14 lines, arcs and shapes, not listed

## Silkscreen, mask and mechanical layers (free items; w line width, h text height)
Top Overlay:
  text "OFF / ON" at 34,-13.976 h2
  text "+" at 30.75,-15.935 h2
  text "+" at 35.152,-20.935 h2
  text "+" at 33,-33.45 h2
  text "+" at 36.607,-36.417 h2
  text "+3V3" at 1.25,-47.226 h2
  text "+5V" at 3.25,-50.075 h2
  text "GND" at 3,-52.316 h2
  text "GND" at 3,-54.905 h2
Mechanical 1:
  the board outline again, w0.254